# EAGLE board v0.1 (EAGLE 9.2.2)
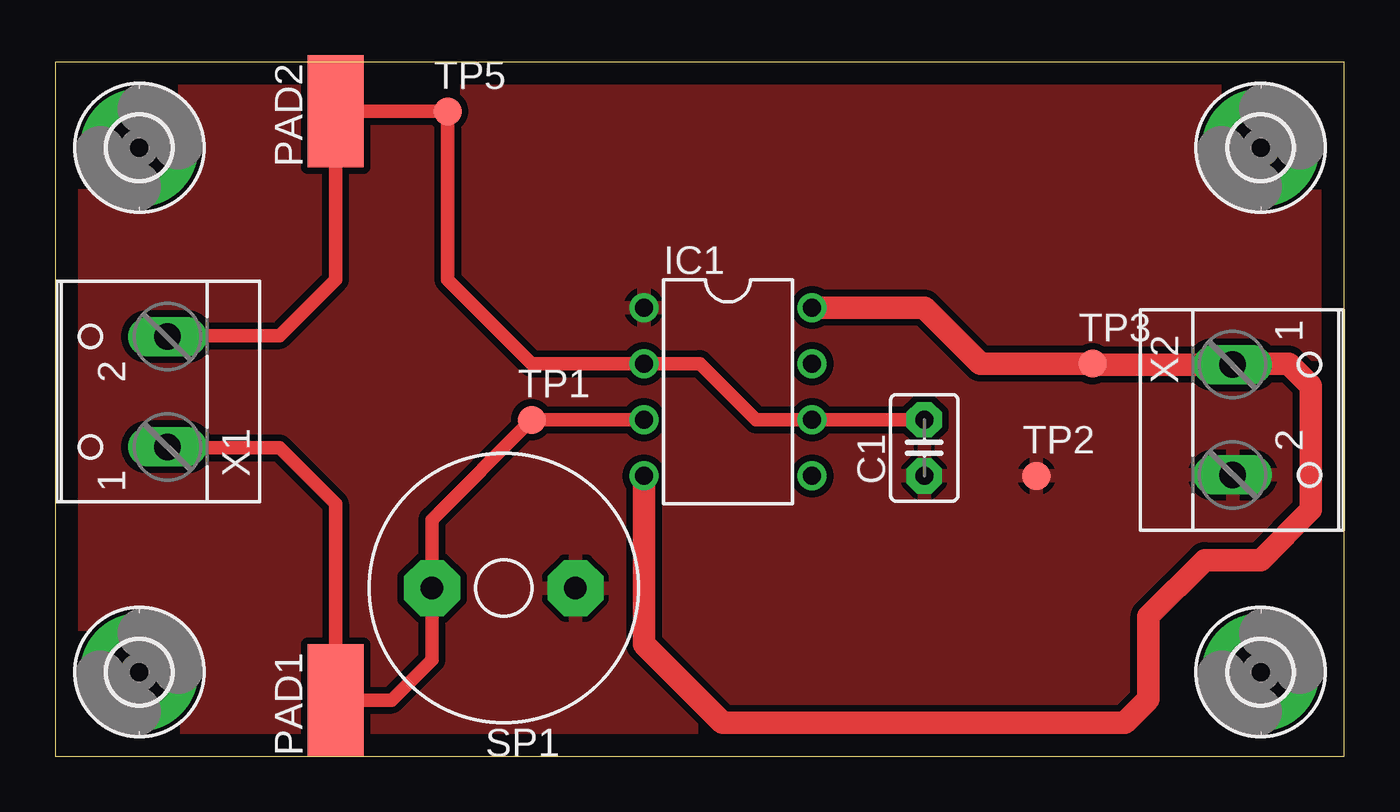
[diagram p0: board, top side]

Size 58.4 x 31.42 mm. Coordinates in mm from the lower left corner, seen from the top.
Outline: 0,0 58.4,0 58.4,31.42 0,31.42 0,0
Copper layers (1*16): Top 0.035mm / dielectric 1.5mm / Bottom 0.035mm
Design rules "default *": minimum track width 6mil, minimum drill 0.35mm, track to track 12mil, track to pad 12mil, pad to pad 12mil, via to via 12mil, smd to smd 12mil, copper to edge 40mil, drill to drill 12mil, minimum pad ring 10mil, minimum via ring 8mil, stop-mask expansion 4mil, vias tented up to drill 0mil, thermal gap 10mil

## Footprints (pad centres in the part's own frame; a part is rotated, then mirrored left to right if it is on the bottom)
C2.5-3 = drill 0.813 pad 1.6 octagon: 1 -1.27,0; 2 1.27,0
2,8-PAD = drill 2.8 pad 5.334: B2,8 0,0
DIL08 = drill 0.813 pad 1.27: 1 -3.81,-3.81; 2 -1.27,-3.81; 3 1.27,-3.81; 4 3.81,-3.81; 5 3.81,3.81; 6 1.27,3.81; 7 -1.27,3.81; 8 -3.81,3.81
SMD2,54-5,08 = smd 2.54 x 5.08: 1 0,0
AL60P = drill 1.016 pad 2.54 octagon: 1 -3.251,0; 2 3.251,0
B1,27 = smd 1.27 x 1.27: TP 0,0
W237-102 = drill 1.194 long: 1 -2.5,-1.27; 2 2.5,-1.27

## Placement (x,y rotation side)
C1  [C2.5-3]  39.37,13.97 90 top
H1  MOUNT-PAD-ROUND2.8  [2,8-PAD]  54.61,27.56 0 top
H2  MOUNT-PAD-ROUND2.8  [2,8-PAD]  54.61,3.81 0 top
H3  MOUNT-PAD-ROUND2.8  [2,8-PAD]  3.81,3.81 0 top
H4  MOUNT-PAD-ROUND2.8  [2,8-PAD]  3.81,27.56 0 top
IC1  LM555N  [DIL08]  30.48,16.51 270 top
PAD1  [SMD2,54-5,08]  12.7,2.54 0 top
PAD2  [SMD2,54-5,08]  12.7,29.21 0 top
SP1  AL60P  [AL60P]  20.32,7.62 180 top
TP1  TPB1,27  [B1,27]  21.59,15.24 0 top
TP2  TPB1,27  [B1,27]  44.45,12.7 0 top
TP3  TPB1,27  [B1,27]  46.99,17.78 0 top
TP5  TPB1,27  [B1,27]  17.78,29.21 0 top
X1  [W237-102]  3.81,16.51 90 top
X2  [W237-102]  54.61,15.24 270 top

## Library data of the parts
C1 = capacitor-wima
H1-H4 = holes
IC1 = linear
PAD1 PAD2 = wirepad
SP1 = buzzer; OC_FARNELL: unknown; OC_NEWARK: unknown
TP1-TP3 TP5 = testpad
X1 X2 = con-wago-500; MPN: 237-102; OC_FARNELL: unknown; OC_NEWARK: 70K9898

## Nets
GND: C1.1 IC1.1 SP1.1 TP2.TP X2.2
N$1: C1.2 IC1.2 IC1.6 PAD2.1 TP5.TP X1.2
N$2: IC1.3 PAD1.1 SP1.2 TP1.TP X1.1
VCC: IC1.4 IC1.8 TP3.TP X2.1

## Tracks (layer width: path | path; a pad name or v marks a point on that pad's centre or on a via)
GND
  pour Top: 0,0 0,31.75 58.42,31.75 58.42,0
N$1
  Top 0.61: X1.2 5.12,19.05 10.16,19.05 12.7,21.59 PAD2.1 TP5.TP 17.78,21.59 21.59,17.78 IC1.2 29.21,17.78 31.75,15.24 IC1.6 C1.2
N$2
  Top 0.61: X1.1 5.12,13.97 10.16,13.97 12.7,11.43 PAD1.1 15.24,2.54 17.07,4.37 SP1.2 17.07,10.72 TP1.TP IC1.3
VCC
  Top 0.61: 48.26,1.32 49.53,2.59 | 53.26,17.82 53.32,17.76 X2.1 | TP3.TP 47.03,17.82
  Top 1.016: IC1.4 26.67,5.08 30.23,1.52 48.46,1.52 49.53,2.59 49.53,6.35 52.07,8.89 54.61,8.89 56.88,11.16 56.88,16.78 55.88,17.78 53.34,17.78 53.32,17.76 | X2.1 47.03,17.74 TP3.TP 41.91,17.78 39.37,20.32 IC1.8